# EAGLE board mrShark Programmer (EAGLE 7.1.0)
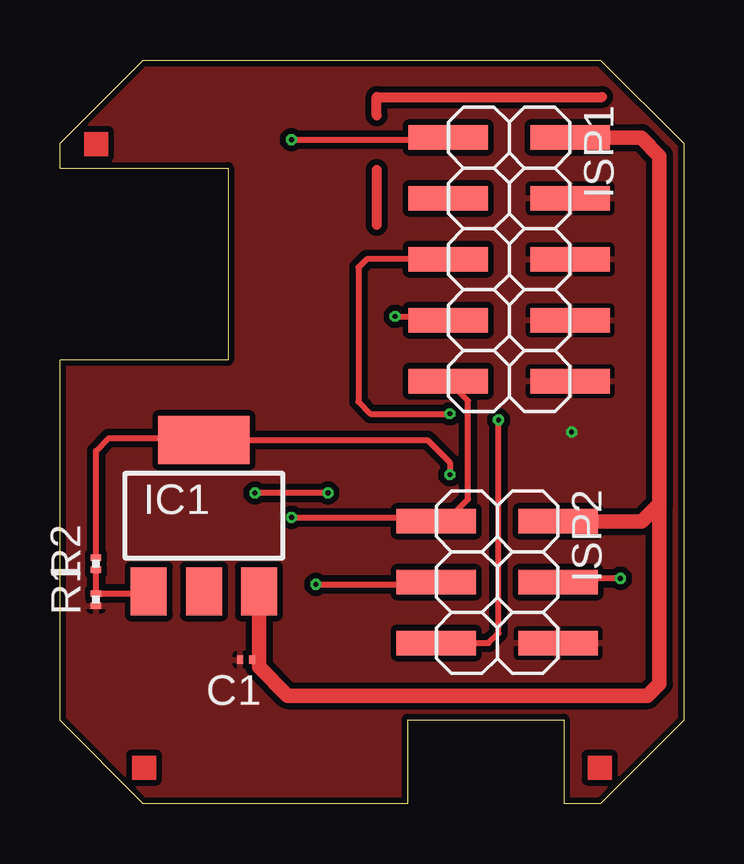
[diagram p0: board, top side]
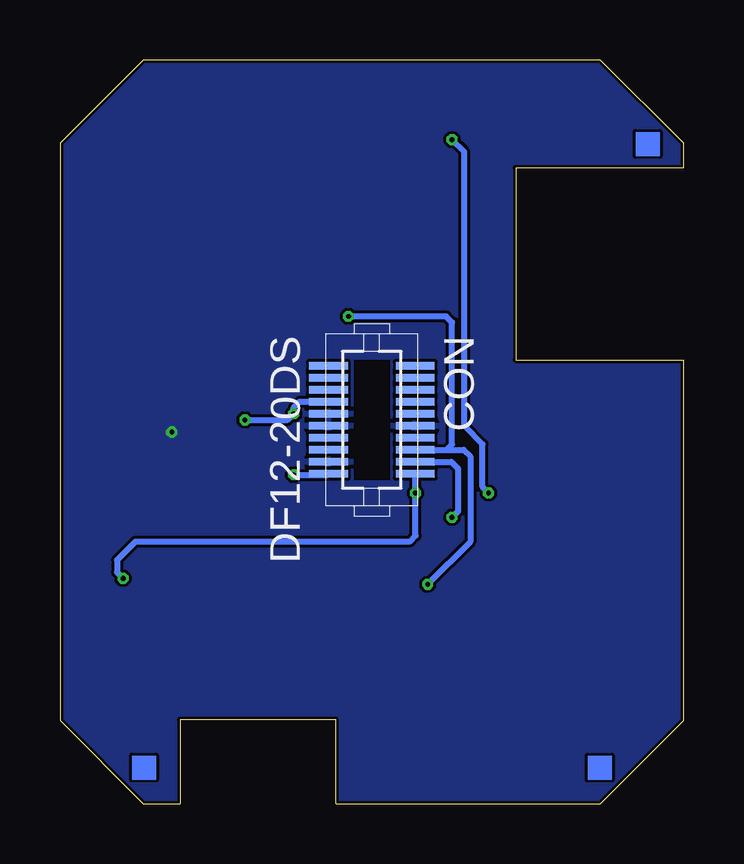
[diagram p1: board, bottom side, seen from below]

Size 26 x 31 mm. Coordinates in mm from the lower left corner, seen from the top.
Outline: 0,3.47 0,18.5 7,18.5 7,26.5 0,26.5 0,27.53 3.47,31 22.53,31 26,27.53 26,3.47 22.53,0 21,0 21,3.5 14.5,3.5 14.5,0 3.47,0 0,3.47
Copper layers (1*16): Top 0.035mm / dielectric 1.5mm / Bottom 0.035mm
Design rules "default": minimum track width 5mil, minimum drill 0.2mm, track to track 5mil, track to pad 5mil, pad to pad 5mil, via to via 5mil, smd to smd 5mil, copper to edge 5mil, drill to drill 5mil, minimum pad ring 5mil, minimum via ring 5mil, stop-mask expansion 0.075mm, vias tented up to drill 0mil, thermal gap 0.2mm

## Footprints (pad centres in the part's own frame; a part is rotated, then mirrored left to right if it is on the bottom)
C0201 = smd 0.25 x 0.35: 1 -0.25,0; 2 0.25,0
DF12-20DS = smd 0.32 x 1.62: 1 -2.25,1.81; 2 -1.75,1.81; 3 -1.25,1.81; 4 -0.75,1.81; 5 -0.25,1.81; 6 0.25,1.81; 7 0.75,1.81; 8 1.25,1.81; 9 1.75,1.81; 10 2.25,1.81; 11 2.25,-1.81; 12 1.75,-1.81; 13 1.25,-1.81; 14 0.75,-1.81; 15 0.25,-1.81; 16 -0.25,-1.81; 17 -0.75,-1.81; 18 -1.25,-1.81; 19 -1.75,-1.81; 20 -2.25,-1.81
SOT223 = smd 1.5 x 2: 1 -2.3,-3.15; 2 0,-3.15; 3 2.3,-3.15 | smd 3.8 x 2: 4 0,3.15
2X05SMD = smd 1.016 x 3.302: 1 -1.27,-3.81; 2 -1.27,1.27; 3 1.27,-3.81; 4 1.27,1.27; 5 3.81,-3.81; 6 3.81,1.27; 7 6.35,-3.81; 8 6.35,1.27; 9 8.89,-3.81; 10 8.89,1.27
2X03SMD = smd 1.016 x 3.302: 1 -1.27,-3.81; 2 -1.27,1.27; 3 1.27,-3.81; 4 1.27,1.27; 5 3.81,-3.81; 6 3.81,1.27
R0201 = smd 0.28 x 0.43: 1 -0.255,0; 2 0.255,0

## Placement (x,y rotation side)
C1  100n  [C0201]  7.75,6 180 top
CON  DF12-20DS  [DF12-20DS]  13,16 270 bottom
IC1  LM317MBSTT3  [SOT223]  6,12 0 top
ISP1  TSM-105-04-T-DV  [2X05SMD]  20,26.5 270 top
ISP2  TSM-103-04-T-DV  [2X03SMD]  19.5,10.5 270 top
R1  165k  [R0201]  1.5,8.5 90 top
R2  100k  [R0201]  1.5,10 90 top

## Library data of the parts
C1 R1 R2 = rcl
CON = con-hirose
IC1 = v-reg
ISP1 ISP2 = pinhead-2

## Nets
+5V: C1.1 IC1.3 ISP1.2 ISP2.2
ADC0: CON.3
ADC1: CON.2
ADC7: CON.7
BAT1+: CON.4
BAT2+: CON.5
GND: C1.2 CON.6 CON.12 CON.15 CON.16 ISP1.4 ISP1.6 ISP1.8 ISP1.10 ISP2.6 R1.1
INT0: CON.14
INT1: CON.13
MISO: CON.9 ISP1.9 ISP2.1
MOSI: CON.10 ISP1.1 ISP2.4
N$3: IC1.1 R1.2 R2.1
RESET: CON.17 ISP1.5 ISP2.5
RXD: CON.1
SCK: CON.8 ISP1.7 ISP2.3
SCL: CON.18
SDA: CON.19
TXD: CON.20
VCC: CON.11 IC1.4 R2.2

## Tracks (layer width: path | path; a pad name or v marks a point on that pad's centre or on a via)
+5V
  Top 0.254: C1.1 8.21,6 8.3,6.09
  Top 0.61: ISP1.2 24.23,27.77 25,27 25,12.5 | ISP2.2 24.27,11.77 25,12.5 | IC1.3 8.3,6.09 8.3,5.7 9.5,4.5 24.5,4.5 25,5 25,12.5
GND  (via drill 0.2)
  other vias: 21.34,15.49
  pour Bottom: 0,3.55 0,18.53 7.11,18.53 7.11,26.66 0,26.66 0,27.42 3.56,30.98 22.61,30.98 25.91,27.68 25.91,3.29 22.61,-0.01 21.08,-0.01 21.08,3.55 14.48,3.55 14.48,-0.01 3.56,-0.01
  pour Top (isolate 0.254): 0,3.55 0,18.53 7.11,18.53 7.11,26.66 0,26.66 0,27.42 3.56,30.98 22.35,30.98 25.91,27.42 25.91,3.29 22.61,-0.01 21.08,-0.01 21.08,3.55 14.48,3.55 14.48,-0.01 3.56,-0.01
MISO  (via drill 0.2)
  Top 0.254: v9.65,11.93 15.53,11.93 ISP2.1 16.1,11.77 17.02,12.69 17.02,16.78 ISP1.9
  Bottom 0.254: CON.9 9.69,14.25 9.4,13.96 9.4,12.18 v9.65,11.93
MOSI  (via drill 0.2)
  Top 0.254: v23.37,9.39 20.93,9.39 ISP2.4 | v11.18,12.95 v8.13,12.95 | v9.65,27.68 16.1,27.68 ISP1.1
  Bottom 0.254: v23.37,9.39 23.62,9.64 23.62,10.15 22.86,10.91 11.43,10.91 11.18,11.17 v11.18,12.95 v11.19,12.96 CON.10 | v8.13,12.95 8.38,13.2 8.38,14.98 9.14,15.74 9.14,27.17 v9.65,27.68
N$1
  Top 0.406: 13.21,28.69 13.21,29.46 22.61,29.46
N$2
  Top 0.406: 13.21,26.41 13.21,24.12
N$3
  Top 0.254: IC1.1 3.6,8.76 R1.2 R2.1
RESET  (via drill 0.2)
  Top 0.254: ISP1.5 12.79,22.69 12.45,22.34 12.45,16.76 12.95,16.25 v16.26,16.25 | ISP2.5 17.87,6.69 18.29,7.1 v18.29,15.99
  Bottom 0.254: CON.17 16,16.76 16.26,16.5 v16.26,16.25 16.51,15.99 v18.29,15.99 | 14.73,16.76 CON.17 | CON.17
SCK  (via drill 0.2)
  Top 0.254: v13.97,20.31 16.03,20.31 ISP1.7 | v10.67,9.14 15.6,9.14 ISP2.3
  Bottom 0.254: 9.88,14.75 9.65,14.98 9.65,20.06 9.91,20.31 v13.97,20.31 | CON.8 9.88,14.75 | 9.88,14.75 9.17,14.75 8.89,14.47 8.89,10.91 v10.67,9.14
VCC  (via drill 0.2)
  Top 0.254: R2.2 1.5,14.7 2.03,15.23 5.92,15.23 IC1.4 15.32,15.15 16.26,14.22 v16.26,13.71
  Bottom 0.254: v16.26,13.71 14.85,13.71 CON.11
(copper drawn outside any net)
  shapes: Bottom area x3, Top area x3

## Text on the board
tTest: ISP1 | ISP2 | NorthernStars | mrShark Programmer